# Altium PCB lsk.PcbDoc
Units mil, origin at the board's own origin, x right, y up, seen from the top; angles counter-clockwise.
Board outline 6000 x 4000 mil, 2 copper layers (Top Layer, Bottom Layer); 20 components, 12 nets, 48 pads, 2 vias.
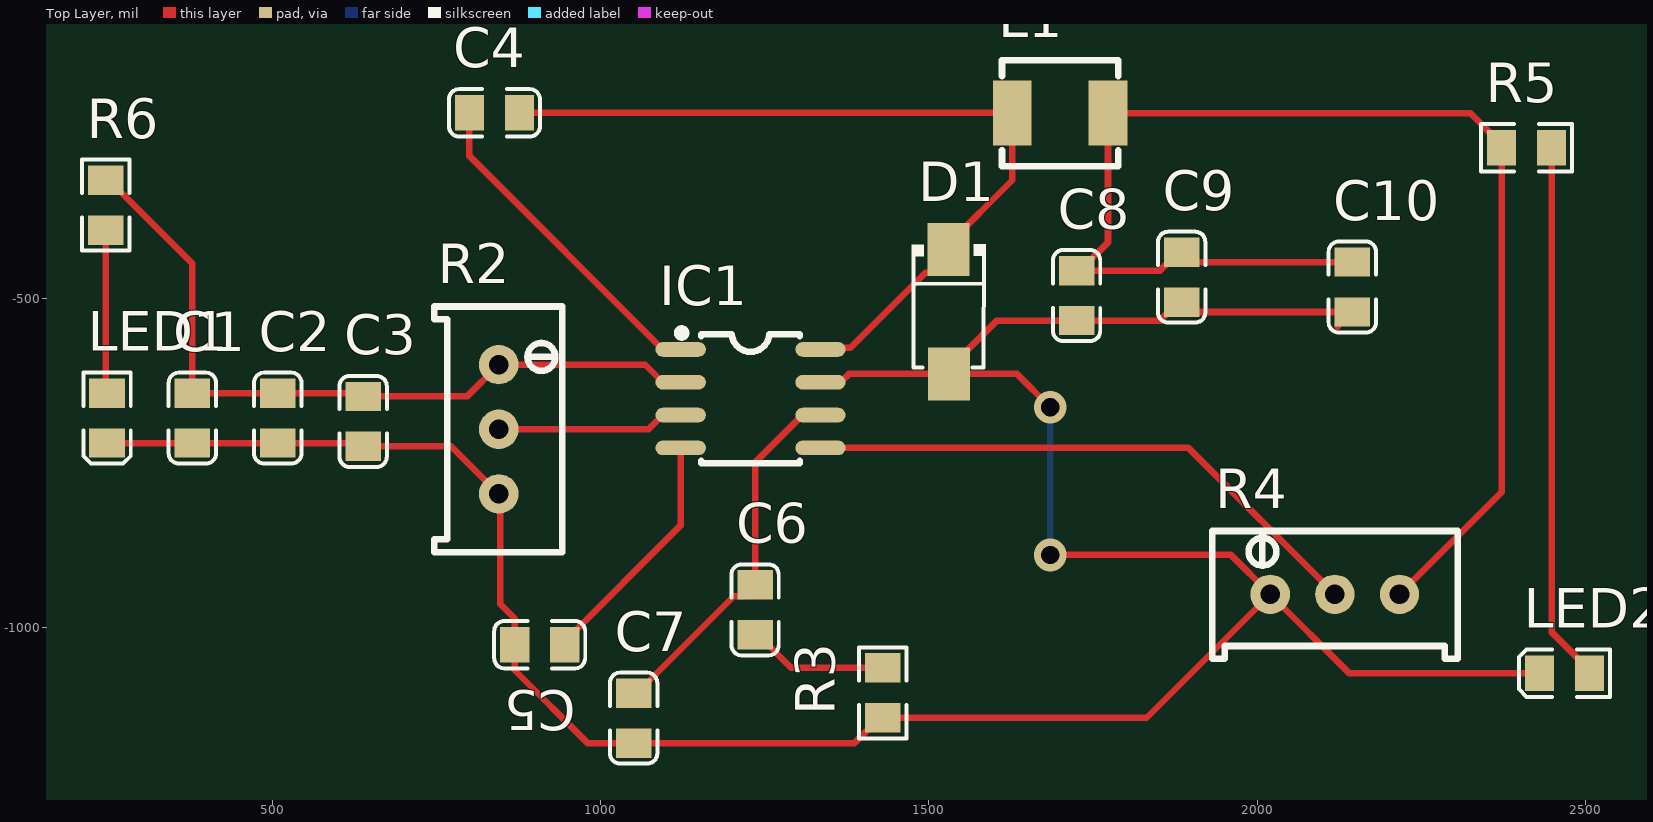
[diagram p0: Top Layer view]
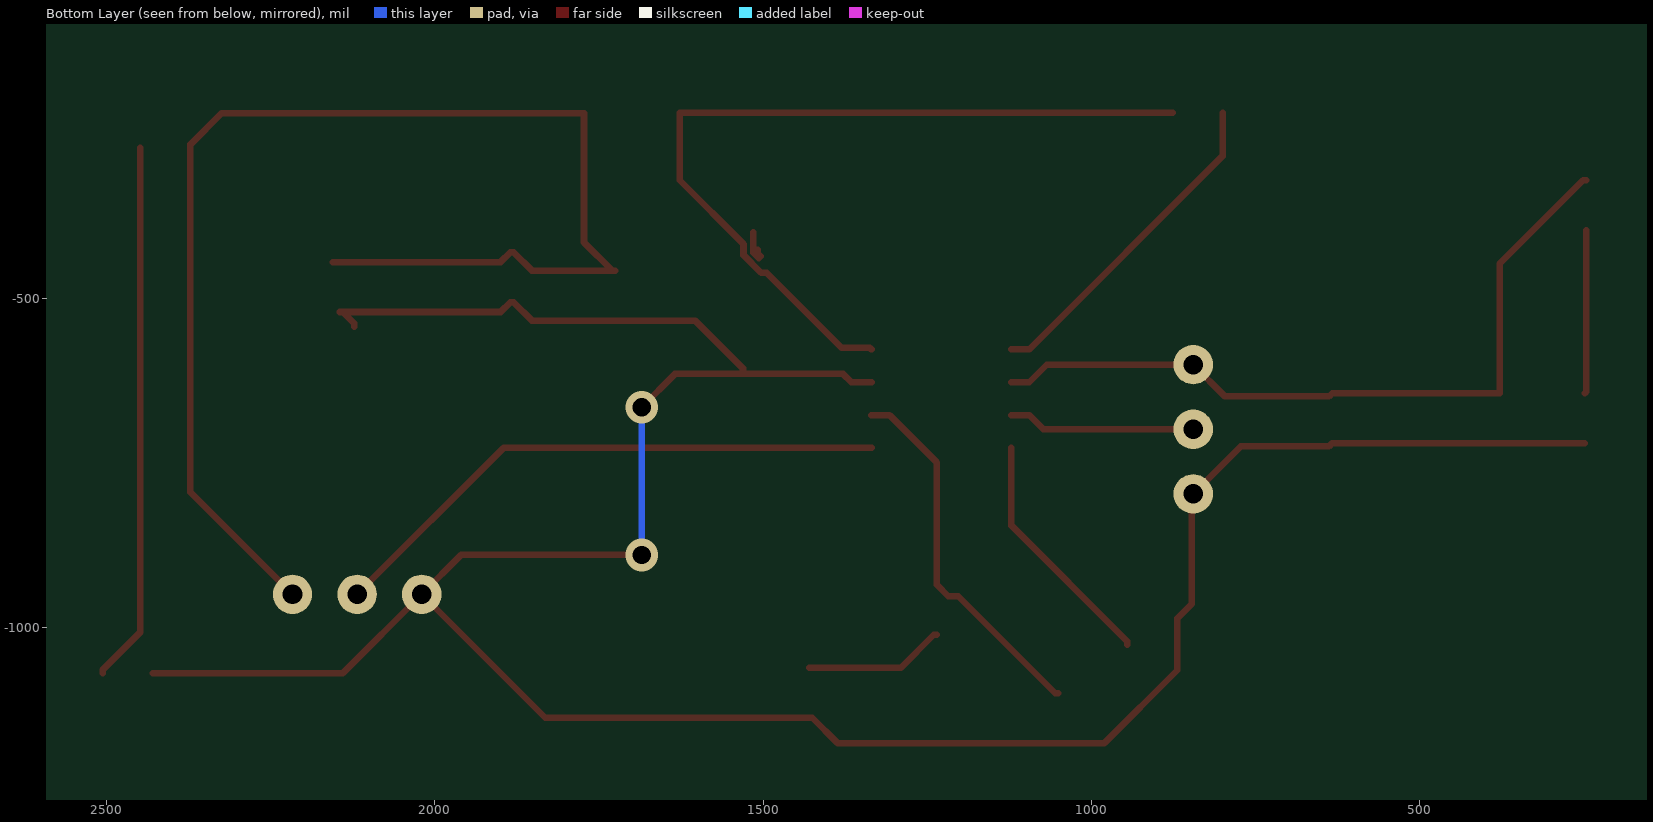
[diagram p1: Bottom Layer view, seen from below]

## Layer stack, top to bottom
Top Solder: solder mask 0.4, Solder Resist, Dk 3.5
Top Layer: signal copper 1.4
Dielectric 1: dielectric 12.6, FR-4, Dk 4.8
Bottom Layer: signal copper 1.4
Bottom Solder: solder mask 0.4, Solder Resist, Dk 3.5

## Board outline
0,-4000 6000,-4000 6000,0 0,0

## Design rules (kind name [scope] priority, off if disabled: settings)
Clearance [All] p1: gap=10 ignorepadtopadclearanceinfootprint=FALSE except(0: Arc-Hole Track-Hole SMDPad-Hole THPad-Hole Via-Hole Fill-Hole Poly-Hole Region-Hole Text-Hole)
PolygonConnect [All] p1: connectstyle=Relief reliefconductorwidth=10 reliefentries=4 polygonreliefangle="90 Angle" airgapwidth=10
RoomDefinition Sheet1 [InComponentClass('Sheet1')] p1: confinementstyle=ConfineIn formatcopy=TRUE lockcomponents=FALSE outline 80,-1325 2625,-1325 2625,-71.97 80,-71.97
RoutingVias [All] p1: holewidth=28 width=50 viastyle="Through Hole" minholewidth=28 minwidth=50 maxholewidth=28 maxwidth=50
SolderMaskExpansion [All] p1: expansion=4 istentingtop=FALSE
Width [All] p1: maxlimit=10 minlimit=10 preferedwidth=10
30 further rules are at their usual default settings.

## Components (designator, comment, footprint, x,y, rotation, side; value= is the part's Value field where it differs from the comment)
C1 "22u" C0805 378.4,-681.61 r90 top
C2 "22u" C0805 508.4,-681.61 r90 top
C3 "0.1u" C0805 638.4,-686.61 r90 top
C4 "0.1u" C0805 838.4,-216.61 r0 top
C5 "0.01u" C0805 907.34,-1026.61 r0 top
C6 "1n" C0805 1235.37,-973.58 r90 top
C7 "47p" C0805 1050.37,-1138.58 r90 top
C8 "22u" C0805 1725,-495 r90 top
C9 "22u" C0805 1885,-466.97 r90 top
C10 "0.1u" C0805 2145,-481.97 r90 top
D1 "B340A" DIODE-241AC 1530.37,-519.65 r270 top
IC1 "Tp" SOIC-8 1228.5,-651.97 r0 top
L1 "6.8u" L0420 1700,-216.97 r0 top
LED1 "GR" LED0805 248.4,-681.61 r90 top
LED2 "RD" LED0805 2468.03,-1070 r0 top
R2 "100k" 3296W 845,-698.57 r270 top
R3 "29.4k" R0805 1430,-1100 r90 top
R4 "100k" 3296W 2118.4,-950 r0 top
R5 "510R" R0805 2410.37,-269.65 r180 top
R6 "1k" R0805 246.43,-357.31 r90 top

## Footprints (in the part's own frame and the unit in brackets; to place one, negate y for a bottom-side part, rotate by r counter-clockwise, add the part's x,y. Pads: shape width x height; smd on the part's side, far side on the other; paste and mask are expansions set on the pad)
3296W [mil]
  round 60 hole 30 mask+2: 1(-98.4,0) 2(98.4,0) 3(0,0)
  silkscreen extent -187,-98 187,97
C0805 [mil]
  rect 44.61x54.21 smd mask+2.01: 1(-38.03,0) 2(38.03,0)
  silkscreen extent -69,-36 69,36
DIODE-241AC [mm]
  rect 2.046x1.62 smd: 1(-2.404,-0.009) 2(2.404,0.009)
  silkscreen extent -2.61,-1.44 2.16,1.44
L0420 [mm]
  rect 1.5x2.5 smd mask+0.051: 1(-1.85,0) 2(1.85,0)
  silkscreen extent -2.25,-2.05 2.25,2.05
LED0805 [mil]
  rect 44.61x54.21 smd mask+2.01: 1(38.03,0) 2(-38.03,0)
  silkscreen extent -69,-36 69,36
R0805 [mil]
  rect 44.61x54.21 smd mask+2.01: 1(-38.03,0) 2(38.03,0)
  silkscreen extent -69,-36 69,36
SOIC-8 [mil]
  oval 76.78x22.38 smd: 1(-106.5,75) 2(-106.5,25) 3(-106.5,-25) 4(-106.5,-75) 5(106.5,-75) 6(106.5,-25) 7(106.5,25) 8(106.5,75)
  silkscreen extent -111,-98 75,106

## Part data
C1 C2 C3 C4 C5 C6 C7 C8 C9 C10: library part Capacitance
D1: library part Diode_NORMAL
IC1: library part IC_8P
L1: library part Inductance
LED1 LED2: library part LED_IR_IN
R2 R4: library part Resistance_ADJ
R3 R5 R6: library part Resistance

## Via types
v1: diameter 50, hole 28, Top Layer to Bottom Layer, 2 vias

## Nets (pads, with @x,y where several pads share a name; then routed paths per layer and width w, separated by ;. In a path a pad name is that pad's centre, name@x,y a point inside that pad or via, vN(x,y) a via of type N, cw(c..) or ccw(c..) an arc to the next point about the centre after c; other vN are vias at no path point)
FB: IC1.5 R4.3 | length 875.8
  Top Layer w10: IC1.5 1895.37,-726.97 R4.3
GND: C1.1 C2.1 C3.1 C5.1 C7.1 C8.1 C9.1 C10.1 D1.2 IC1.7 LED1.2 LED2.2 R2.2 R3.1 R4.1 | length 4318.7
  Top Layer w10: LED1.2 C1.1 C2.1 633.4,-719.65 C3.1 772.68,-724.65 R2.2 847,-798.97 847,-964.31 869.31,-986.61 C5.1 869.31,-1065.72 980.2,-1176.61 C7.1 1386.61,-1176.61 1425.2,-1138.03 R3.1 1831.97,-1138.03 R4.1 ; IC1.7 1365.55,-626.97 1378.23,-614.29 D1.2 ; v1(1685,-890) 1960,-890 R4.1 ; v1(1685,-665) 1634.29,-614.29 D1.2 ; C10.1@2122.89,-542.11 2122.89,-537.3 C10.1@2140.2,-520 ; C10.1 C10.1@2140.2,-520 ; LED2.2 2140,-1070 R4.1 ; D1.2 1530.74,-605.9 1603.61,-533.03 C8.1 1852.17,-533.03 1880.2,-505 C9.1 1900,-520 C10.1@2140.2,-520
  Bottom Layer w10: v1(1685,-890) v1(1685,-665)
NetC4_1: C4.1 IC1.1 | length 509.5
  Top Layer w10: C4.1 800.37,-282.54 1094.8,-576.97 IC1.1
NetC4_2: C4.2 D1.1 IC1.8 L1.1 | length 1320
  Top Layer w10: C4.2 1626.81,-216.61 L1.1 1627.17,-319.44 1530,-416.61 D1.1 1530,-433.39 1503.11,-460.28 1494.72,-460.28 1380.4,-574.6 1337.37,-574.6 IC1.8 ; D1.1@1503.86,-435.15 D1.1@1507.53,-431.48 ; D1.1@1506.61,-437.9 1515,-429.5 D1.1@1515,-398.58 ; D1.1@1508.45,-425.05 1507.96,-428.49 D1.1@1507.53,-431.48 ; D1.1@1510,-429.01 D1.1@1507.53,-431.48
NetC5_2: C5.2 IC1.4 | length 372.8
  Top Layer w10: C5.2 945.37,-1021.81 1122,-845.18 IC1.4
NetC6_1: C6.1 R3.2 | length 215.5
  Top Layer w10: C6.1 1240.17,-1011.61 1290.53,-1061.97 R3.2
NetC6_2: C6.2 C7.2 IC1.6 | length 569.1
  Top Layer w10: C7.2 1055.17,-1100.55 1202.87,-952.85 1218.07,-952.85 C6.2 1235.37,-749.4 1307.8,-676.97 IC1.6
NetIC1_3: IC1.3 R2.3 | length 285.9
  Top Layer w10: R2.3 1073.2,-698.57 1094.8,-676.97 IC1.3
NetLED1_1: LED1.1 R6.1 | length 249.1
  Top Layer w10: R6.1 246.43,-641.61 LED1.1
NetLED2_1: LED2.1 R5.1 | length 824.2
  Top Layer w10: R5.1 2448.4,-1007.54 2506.06,-1065.2 LED2.1
Vin: C1.2 C2.2 C3.2 IC1.2 R2.1 R6.2 | length 1158.6
  Top Layer w10: R6.2 251.24,-319.28 378.4,-446.44 C1.2 C2.2 633.4,-643.58 C3.2 796.59,-648.58 R2.1 1068,-600.17 1094.8,-626.97 IC1.2
Vout: C8.2 C9.2 C10.2 L1.2 R4.2 R5.2 | length 2074.7
  Top Layer w10: C8.2 C8.2@1729.8,-456.97 ; C10.2@2155.16,-443.94 1900,-443.94 C9.2 1880.2,-428.94 1852.17,-456.97 C8.2@1729.8,-456.97 ; R4.2 2372.34,-794.46 R5.2 2372.34,-264.84 2324.47,-216.97 L1.2 1772.83,-413.94 C8.2@1729.8,-456.97